# Altium PCB Carte_fini.PcbDoc
Units mm, origin at the board's own origin, x right, y up, seen from the top; angles counter-clockwise.
Board outline 130 x 65 mm, 4 copper layers (Top Layer, Internal Plane 1, Internal Plane 2, Bottom Layer); 20 components, 32 nets, 78 pads, 0 vias.
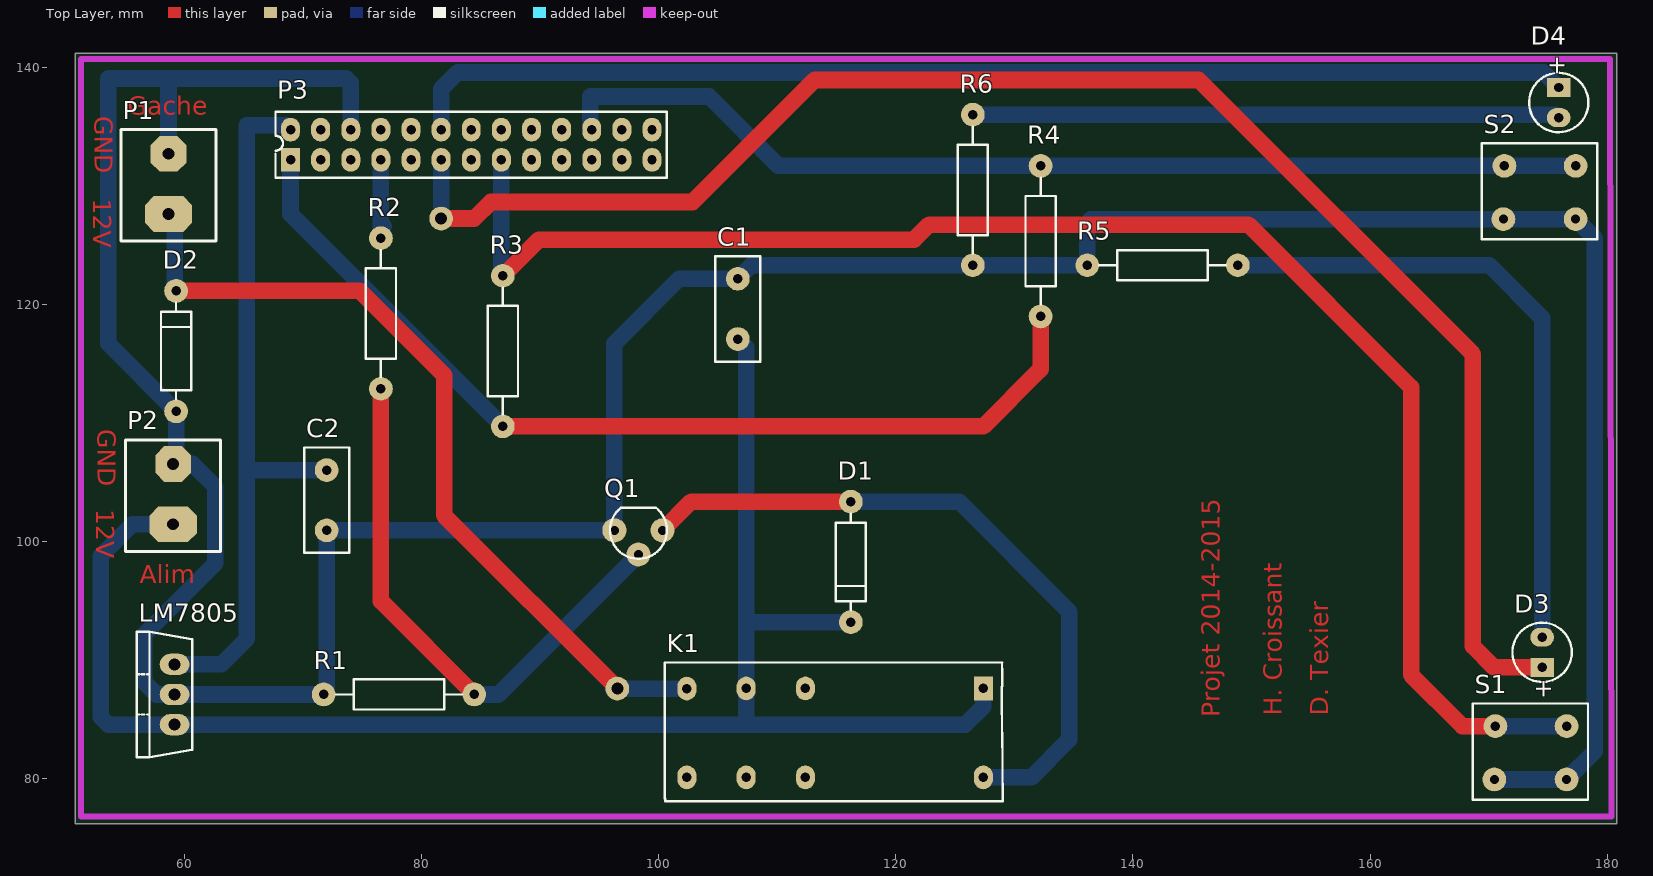
[diagram p0: Top Layer view]
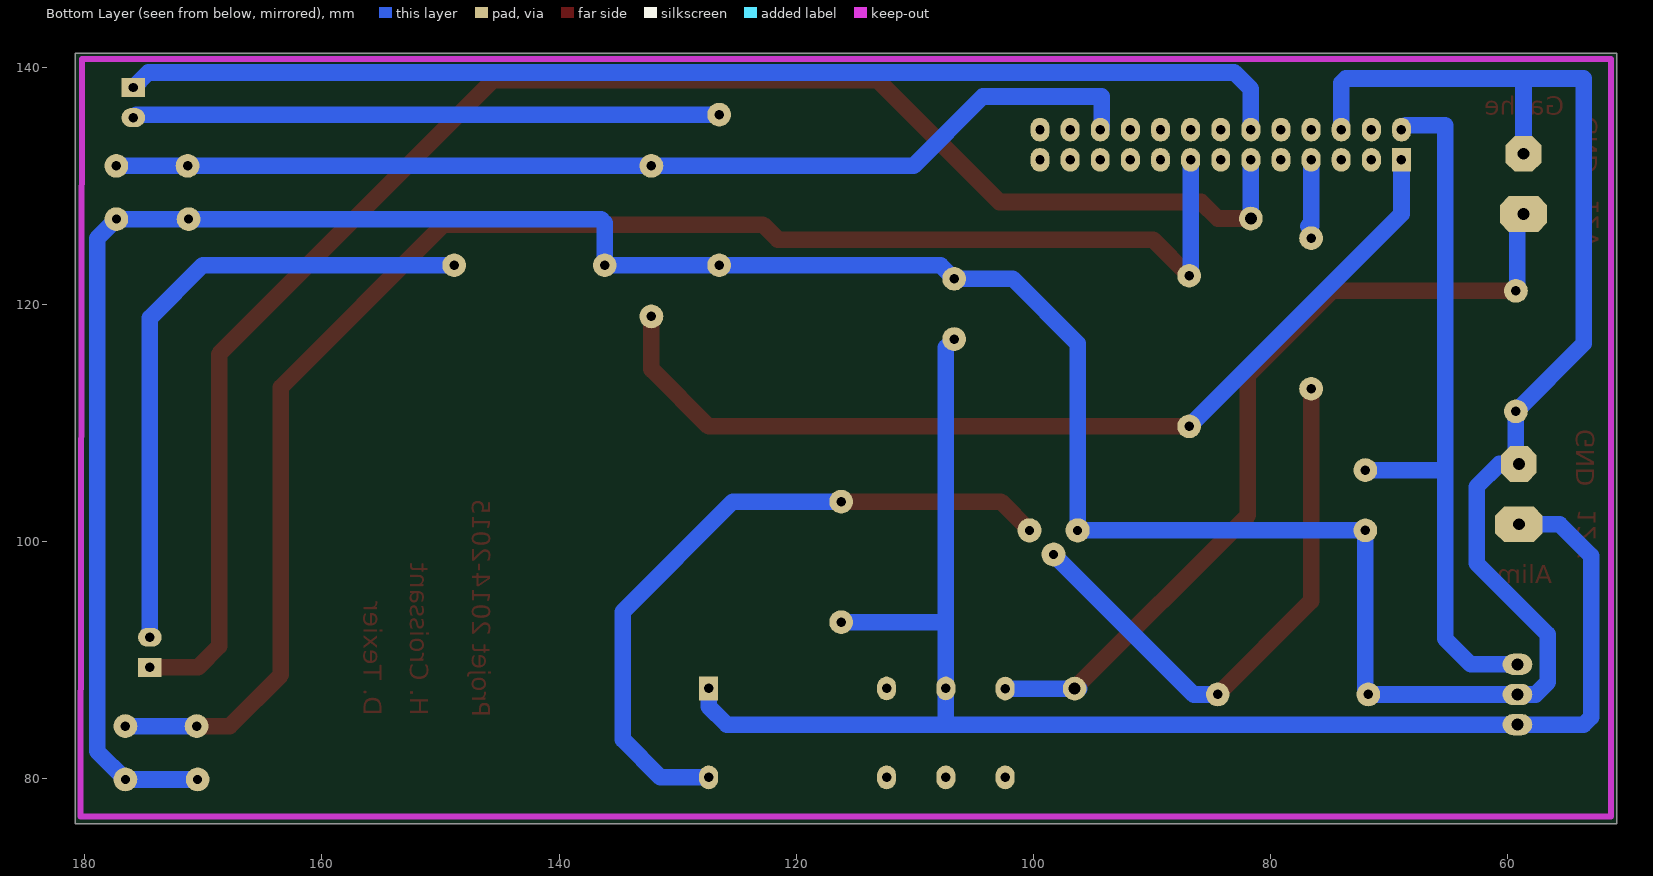
[diagram p1: Bottom Layer view, seen from below]
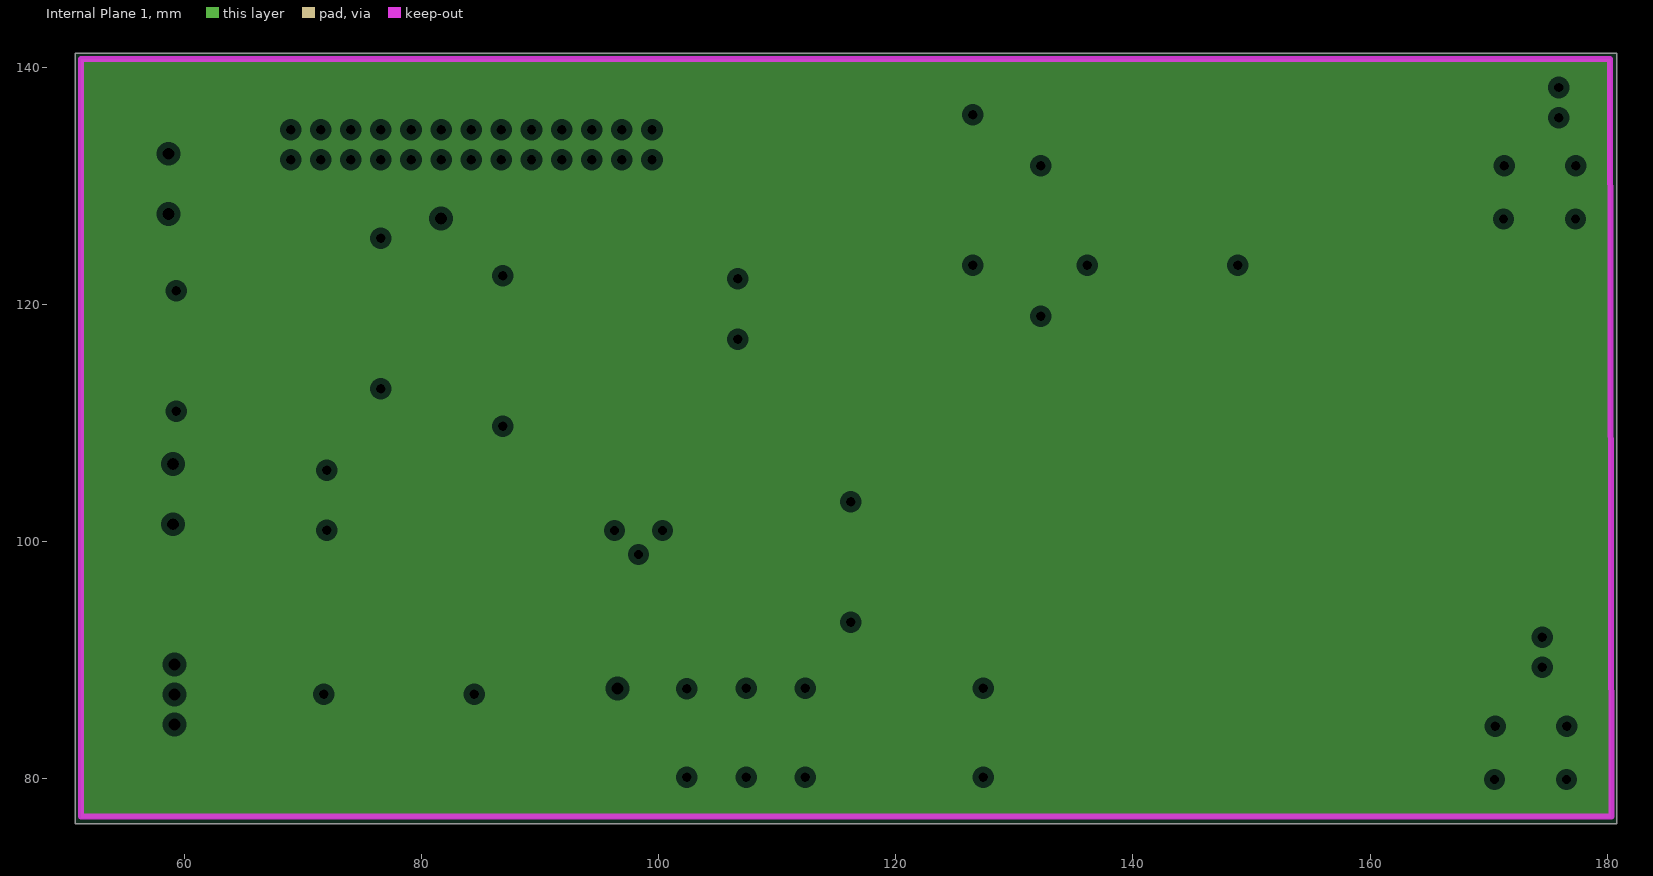
[diagram p2: Internal Plane 1, clearances drawn from the general rule]
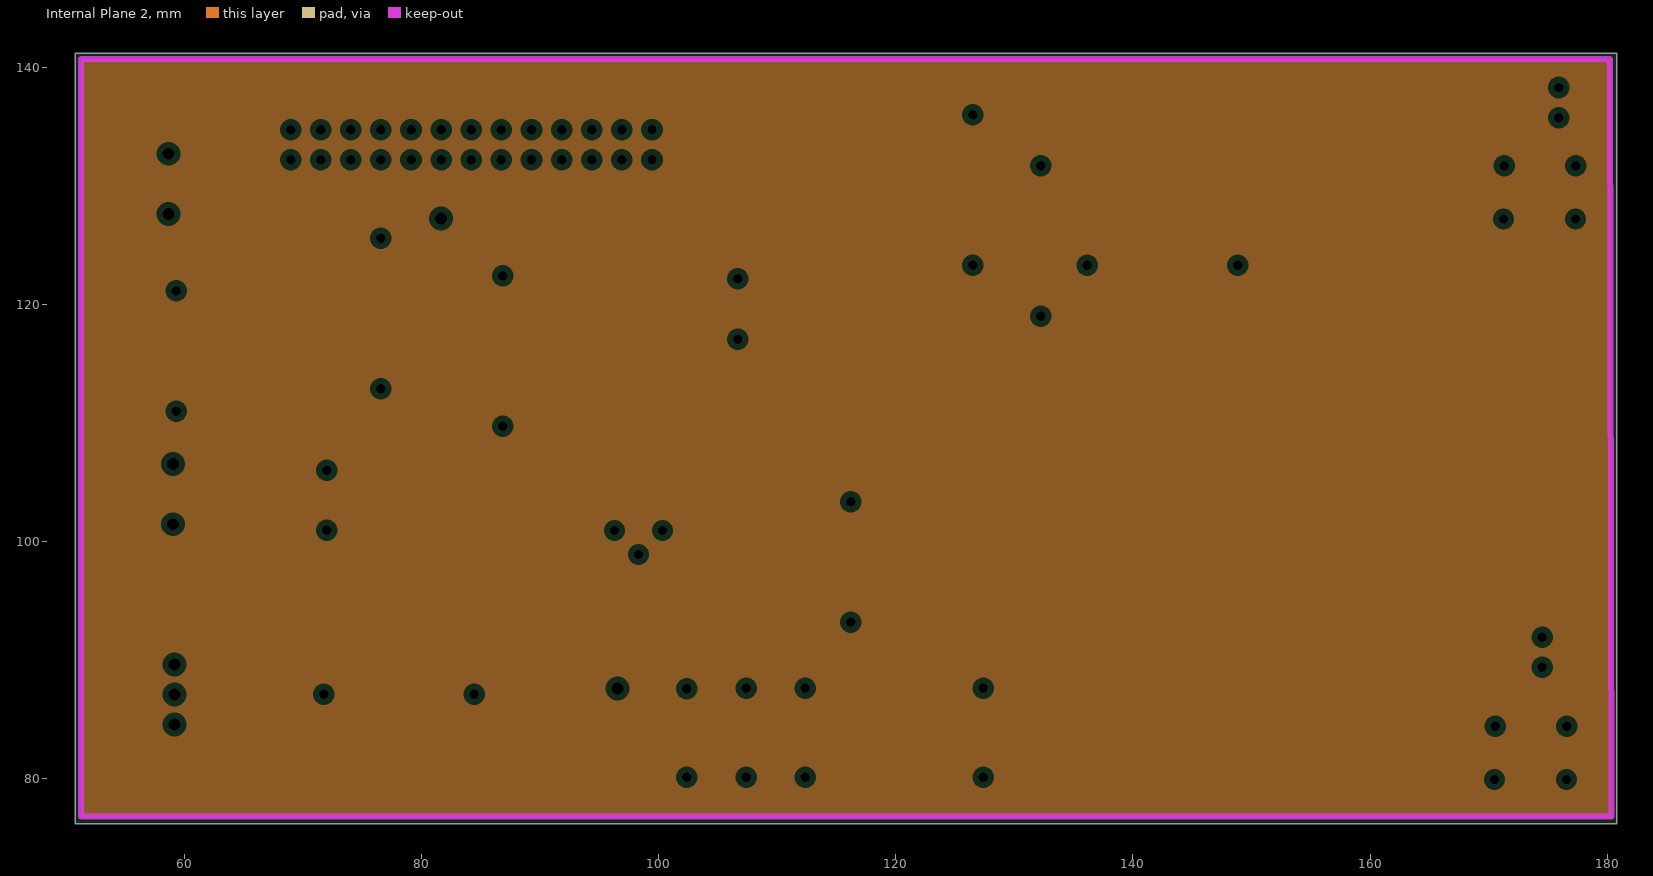
[diagram p3: Internal Plane 2, clearances drawn from the general rule]

## Layer stack, top to bottom
Top Layer: signal copper 0.0356
Dielectric: dielectric 0.32, FR-4, Dk 4.8
Internal Plane 1: plane copper 0.0356
Dielectric: dielectric 0.32, FR-4, Dk 4.8
Internal Plane 2: plane copper 0.0356
Dielectric: dielectric 0.32, FR-4, Dk 4.8
Bottom Layer: signal copper 0.0356

## Board outline
50.8,76.2 180.8,76.2 180.8,141.2 50.8,141.2

## Design rules (kind name [scope] priority, off if disabled: settings)
Clearance [All] p1: gap=0.2
PlaneClearance [All] p1: clearance=0.508
PlaneConnect [All] p1: planeconnectstyle=Relief reliefexpansion=0.508 reliefentries=4 reliefconductorwidth=0.254 reliefairgap=0.254
PolygonConnect [All] p1: connectstyle=Relief reliefconductorwidth=0.254 reliefentries=4 polygonreliefangle="90 Angle" airgapwidth=0.254
RoutingVias [All] p1: holewidth=1 width=2 viastyle="Through Hole" minholewidth=0.711 minwidth=1.27 maxholewidth=0.711 maxwidth=1.27
SolderMaskExpansion [All] p1: expansion=0.102
Width [All] p1: maxlimit=1.8 minlimit=1.4 preferedwidth=1.5
26 further rules are at their usual default settings.

## Components (designator, comment, footprint, x,y, rotation, side; value= is the part's Value field where it differs from the comment)
C1 "" RAD-0.2 106.68,119.634 r270 top
C2 "" RAD-0.2 72.009,103.505 r90 top
D1 "Diode 1N4007" DIODE-0.4 116.205,98.298 r270 top
D2 "Diode 1N4007" DIODE-0.4 59.309,116.078 r90 top
D3 "LED0" LED 174.498,90.678 r90 top
D4 "LED0" LED 175.895,137.033 r270 top
K1 "Relay-DPST" Relais1 123.571,83.82 r270 top
LM7805 "" TO220V 59.182,84.582 r90 top
P1 "Gache" BORN5-2 58.674,127.635 r90 top
P2 "Alim" BORN5-2 59.055,101.473 r90 top
P3 "Raspberry" DIP-20 72.771,136.017 r90 top
Q1 "BC337" TO92-2 100.33,100.965 r180 top
R1 "" AXIAL-0.5 78.105,87.122 r180 top
R2 "" AXIAL-0.5 76.581,119.253 r270 top
R3 "" AXIAL-0.5 86.868,116.078 r90 top
R4 "" AXIAL-0.5 132.207,125.349 r90 top
R5 "" AXIAL-0.5 142.494,123.317 r180 top
R6 "" AXIAL-0.5 126.492,129.667 r270 top
S1 "" BP 174.371,84.455 r0 top
S2 "" BP 175.133,131.699 r0 top

## Footprints (in the part's own frame and the unit in brackets; to place one, negate y for a bottom-side part, rotate by r counter-clockwise, add the part's x,y. Pads: shape width x height; smd on the part's side, far side on the other; paste and mask are expansions set on the pad)
AXIAL-0.5 [mm] "Axial Device, Thru-Hole; 2 Leads; 0.5 in Pin Spacing"
  round 2 hole 0.8: 1(-6.35,0) 2(6.35,0)
  silkscreen extent -5.33,-1.27 5.33,1.27
BORN5-2 [mm]
  oct 3x4 hole 1: 1(0,0)
  oct 3x3 hole 1: 2(5.08,0)
  silkscreen extent -2.29,-4 7.11,4
BP [mm] "Radial Cap, Thru-Hole; 2 Leads; 0.3 in Pin Spacing"
  round 2 hole 0.8: 1(-3.81,0) 1(2.19,0)
  round 2 hole 0.762: 2(-3.9,-4.5) 2(2.19,-4.5)
  silkscreen extent -5.71,-6.2 4,1.91
DIODE-0.4 [mm] "Diode, Thru-Hole; 2 Leads; 0.4 in Pin Spacing"
  round 2 hole 0.8: 1(-5.08,0) 2(5.08,0)
  silkscreen extent -4.06,-1.27 4.06,1.27
DIP-20 [mm] "DIP; 14 Leads; Row Spacing 7.62 mm; Pitch 2.54 mm"
  rect 2x1.6 hole 0.8: 1(-3.81,3.81)
  oval 2x1.6 hole 0.8: 2(-1.27,3.81) 3(-3.81,1.27) 4(-1.27,1.27) 5(-3.81,-1.27) 6(-1.27,-1.27) 7(-3.81,-3.81) 8(-1.27,-3.81) 9(-3.81,-6.35) 10(-1.27,-6.35) 11(-3.81,-8.89) 12(-1.27,-8.89) 13(-3.81,-11.43) 14(-1.27,-11.43) 15(-3.81,-13.97) 16(-1.27,-13.97) 17(-3.81,-16.51) 18(-1.27,-16.51) 19(-3.81,-19.05) 20(-1.27,-19.05) 21(-3.81,-21.59) 22(-1.27,-21.59) 23(-3.81,-24.13) 24(-1.27,-24.13) 25(-3.81,-26.67) 26(-1.27,-26.67)
  silkscreen extent -5.33,-27.9 0.24,5.08
LED [mm] "LED; Pin Spacing 2.54 mm (typ)"
  rect 1.6x2 hole 0.8: 1(-1.27,0)
  oval 1.6x2 hole 0.8: 2(1.27,0)
  silkscreen extent -2.5,-2.5 2.5,2.5
RAD-0.2 [mm] "Radial Cap, Thru-Hole; 2 Leads; 0.2 in Pin Spacing"
  round 2 hole 0.8: 1(-2.54,0) 2(2.54,0)
  silkscreen extent -4.44,-1.91 4.44,1.91
Relais1 [mm] "DIP; 8 Leads; Row Spacing 7.62 mm; Pitch 2.54 mm"
  oval 2x1.6 hole 0.8: 1(3.69,-21.19) 2(-3.81,-11.19) 3(-3.81,-16.19) 4(-3.8,-21.19) 6(3.69,3.81) 7(3.69,-11.19) 8(3.69,-16.19)
  rect 2x1.6 hole 0.8: 5(-3.81,3.81)
  silkscreen extent -6,-23.04 5.7,5.45
TO92-2 [mil]
  round 80 hole 30: 1(160,0) 2(80,80) 3(0,0)
  silkscreen extent -14,-75 174,94
TO220V [mm]
  oval 1.8x2.5 hole 1: 1(0,0) 2(2.54,0) 3(5.08,0)
  silkscreen extent -2.75,-1.48 7.83,3.18

## Part data
C1 C2: library part Cap, "Capacitor"
D1 D2: "1 Amp General Purpose Rectifier"
D3 D4: "Typical INFRARED GaAs LED"
K1: "Dual-Pole Single-Throw Relay"
LM7805: library part "Volt Reg", "Voltage Regulator"
P1 P2: library part "Header 2", "Header, 2-Pin"
P3: library part MHDR2X13, "Header, 13-Pin, Dual row"
Q1: library part 2N3904, "NPN General Purpose Amplifier"
R1 R2 R3 R4 R5 R6: library part Res1, "Resistor"
S1 S2: library part SW-PB, "Switch"

## Free pads (board coordinates)
  round 2 hole 1: 0(81.661,127.254) 1(96.52,87.62)

## Nets (pads, with @x,y where several pads share a name; then routed paths per layer and width w, separated by ;. In a path a pad name is that pad's centre, name@x,y a point inside that pad or via, vN(x,y) a via of type N, cw(c..) or ccw(c..) an arc to the next point about the centre after c; other vN are vias at no path point)
1: P3.1 R3.1 R4.1 | length 81.5
  Top Layer w1.4: R3.1 127.381,109.728 132.08,114.427 ; 132.207,114.554 R4.1
  Bottom Layer w1.4: P3.1 68.961,127.635 R3.1
3: P3.3
4: P3.4
5: P3.5
8: P3.8
9: P3.9
10: P3.10
12V: C1.2 D1.2 K1.3 K1.5 LM7805.1 P2.1 | length 139.1
  Bottom Layer w1.4: P2.1 55.626,101.473 52.959,98.806 52.959,85.217 53.594,84.582 LM7805.1 125.857,84.582 127.381,86.106 K1.5 ; C1.2 107.381,116.393 107.381,93.345 ; 107.381,84.77 K1.3 107.381,93.345 ; D1.2 107.508,93.218 107.381,93.345
13: P3.13
14: P3.14
16: P3.16
17: P3.17
18: P3.18
19: P3.19
20: P3.20
21: P3.21
23: P3.23
24: P3.24
25: P3.25
26: P3.26
GND: C1.1 C2.1 D2.1 LM7805.2 P1.2 P2.2 P3.6 Q1.1 R1.2 R5.2 R6.2 S1.2 S2.2 | length 301.3
  Bottom Layer w1.4: P1.2 58.674,138.811 58.928,139.065 ; P3.6 74.041,138.684 73.66,139.065 58.928,139.065 ; S1.2@170.471,79.955 176.561,79.955 178.943,82.337 178.943,125.579 177.323,127.199 171.233,127.199 136.453,127.199 136.144,126.89 R5.2 R6.2 107.823,123.317 C1.1 101.727,122.174 96.266,116.713 Q1.1 C2.1 72.009,87.376 R1.2 LM7805.2 57.658,87.122 56.642,88.138 56.642,92.202 62.611,98.171 62.611,104.648 60.706,106.553 P2.2 59.309,106.807 D2.1 53.594,116.713 53.594,139.065 58.928,139.065
GPIO2: C2.2 LM7805.3 P3.2 | length 60.6
  Bottom Layer w1.4: LM7805.3 63.119,89.662 65.278,91.821 65.278,135.128 68.58,135.128 P3.2 ; 65.532,106.045 C2.2
GPIO4: P3.7 R2.1 | length 5.8
  Bottom Layer w1.4: P3.7 76.581,126.619 76.835,126.619
GPIO17: D3.1 P3.11 pad.0 | length 137.6
  Top Layer w1.4: pad.0 84.455,127.254 85.852,128.651 102.87,128.651 113.157,138.938 145.542,138.938 168.656,115.824 168.656,91.186 170.434,89.408 D3.1
  Bottom Layer w1.4: pad.0 P3.11
GPIO18: D4.1 P3.12 | length 98.8
  Bottom Layer w1.4: P3.12 81.661,138.176 83.051,139.566 174.632,139.566 D4.1
GPIO22: P3.15 R3.2 S1.1 | length 132.9
  Top Layer w1.4: R3.2 89.916,125.476 121.539,125.476 122.809,126.746 149.733,126.746 163.449,113.03 163.449,88.773 167.767,84.455 S1.1@170.561,84.455
  Bottom Layer w1.4: R3.2@86.741,122.555 P3.15 ; S1.1@170.561,84.455 S1.1@176.561,84.455
GPIO25: P3.22 R4.2 S2.1 | length 88.4
  Bottom Layer w1.4: P3.22 94.234,134.874 94.234,137.541 104.267,137.541 110.109,131.699 132.08,131.699 171.323,131.699 S2.1@177.323,131.699
NetD1_1: D1.1 K1.6 Q1.3 | length 58.5
  Top Layer w1.4: Q1.3 102.743,103.378 D1.1
  Bottom Layer w1.4: D1.1 125.349,103.378 134.62,94.107 134.62,83.312 131.438,80.13 K1.6
NetD2_2: D2.2 K1.4 P1.1 pad.1 | length 71.1
  Top Layer w1.4: D2.2 74.803,121.158 81.915,114.046 81.915,102.225 pad.1
  Bottom Layer w1.4: P1.1 59.182,127.127 D2.2@59.182,121.031 ; pad.1@96.149,87.62 pad.1 K1.4
NetD3_2: D3.2 R5.1 | length 54.4
  Bottom Layer w1.4: R5.1 170.053,123.317 174.498,118.872 D3.2
NetD4_2: D4.2 R6.1 | length 49.5
  Bottom Layer w1.4: R6.1 175.641,136.017 D4.2
NetQ1_2: Q1.2 R1.1 R2.2 | length 47.8
  Top Layer w1.4: R2.2 76.581,94.996 R1.1
  Bottom Layer w1.4: R1.1 86.487,87.122 Q1.2
pads on no net: K1.1 K1.2 K1.7 K1.8

## Polygon pours and split planes (outlines as drawn)
no net on Internal Plane 1 (split plane): 180.8,76.2 50.8,76.2 50.8,141.2 180.8,141.2
no net on Internal Plane 2 (split plane): 180.8,76.2 50.8,76.2 50.8,141.2 180.8,141.2

## Keep-outs
Keep-Out Layer:
  lines w0.5: 180.34,76.835 51.308,76.835 51.308,140.716 180.212,140.716 180.34,76.836

## Other copper
Top Layer:
  text "Gache" at 55.245,136.017 h1.52
  text "GND" at 52.451,135.89 h1.52 r270
  text "12V" at 52.324,128.905 h1.52 r270
  text "GND" at 52.705,109.474 h1.52 r270
  text "12V" at 52.578,102.743 h1.52 r270
  text "Alim" at 56.261,96.52 h1.52
  text "H. Croissant" at 152.527,85.344 h1.52 r90
  text "D. Texier" at 156.464,85.344 h1.52 r90
  text "Projet 2014-2015" at 147.32,85.217 h1.52 r90

## Silkscreen, mask and mechanical layers (free items; w line width, h text height)
Drill Drawing:
  text ".LEGEND" at 185.88,81.28 h1.52
  text "Drill Drawing." at 185.88,78.74 h1.52

## Dimensions
51.308,76.835 to 180.34,76.835 on Mechanical 1
51.308,76.835 to 51.308,140.716 on Mechanical 1

## Text inside footprints (layer, text, board x,y; h text height)
D3: Top Overlay "+" at 175.248,86.703 h1.5 r90
D4: Top Overlay "+" at 175.145,141.008 h1.5 r270